# EAGLE board Copy of demo (EAGLE 5.11)
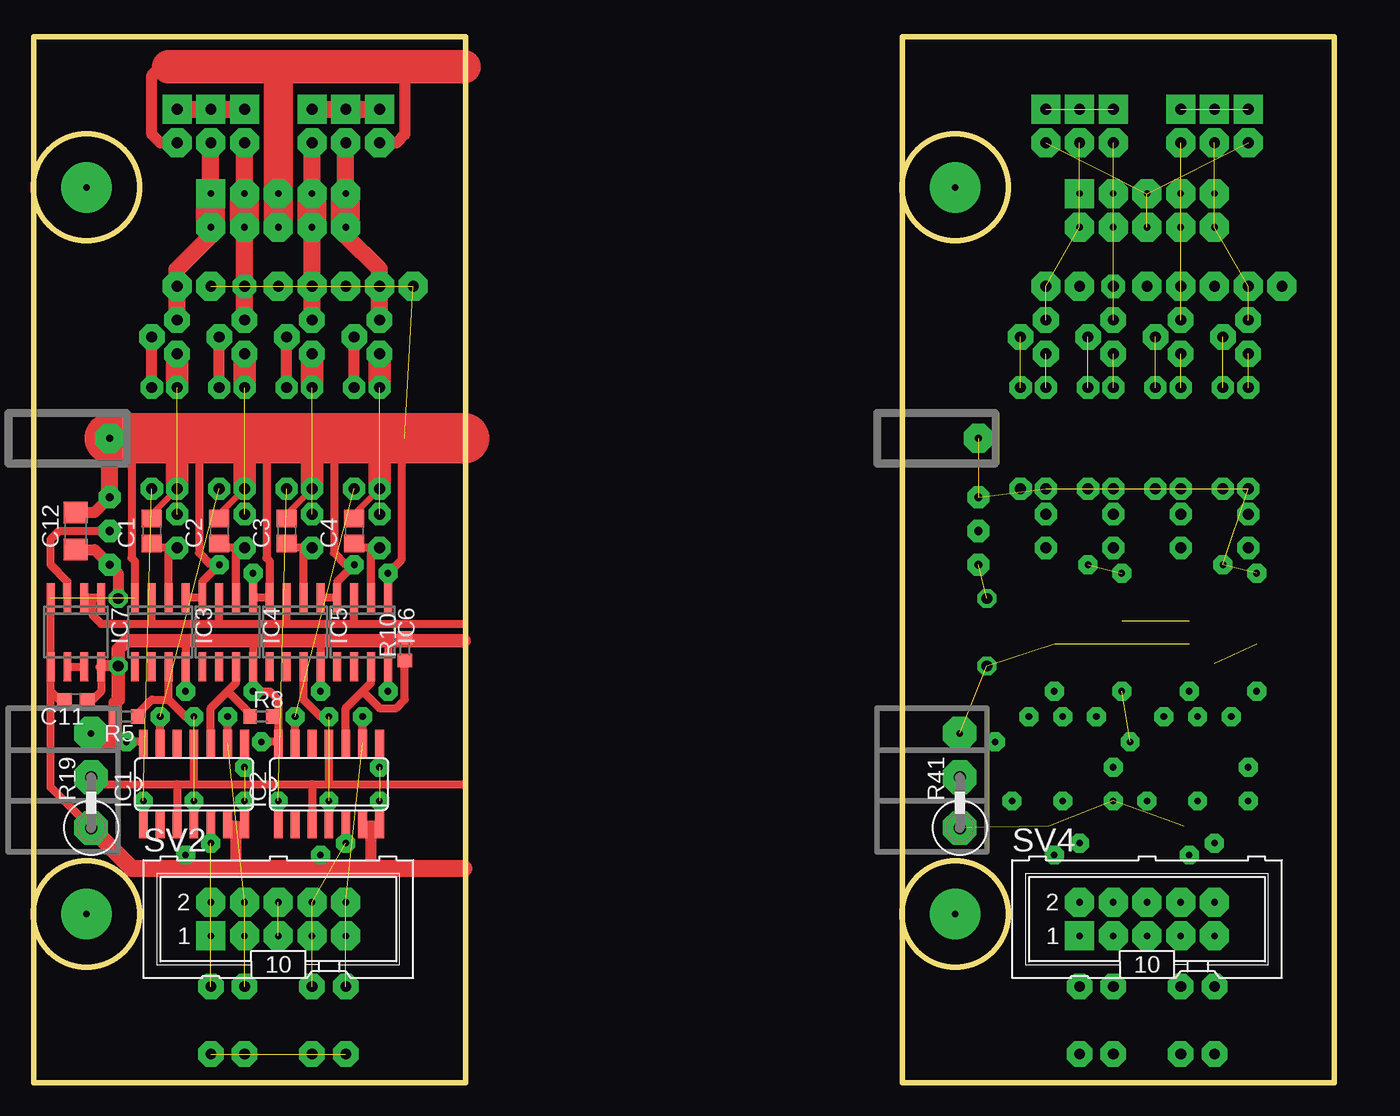
[diagram p0: board, top side]
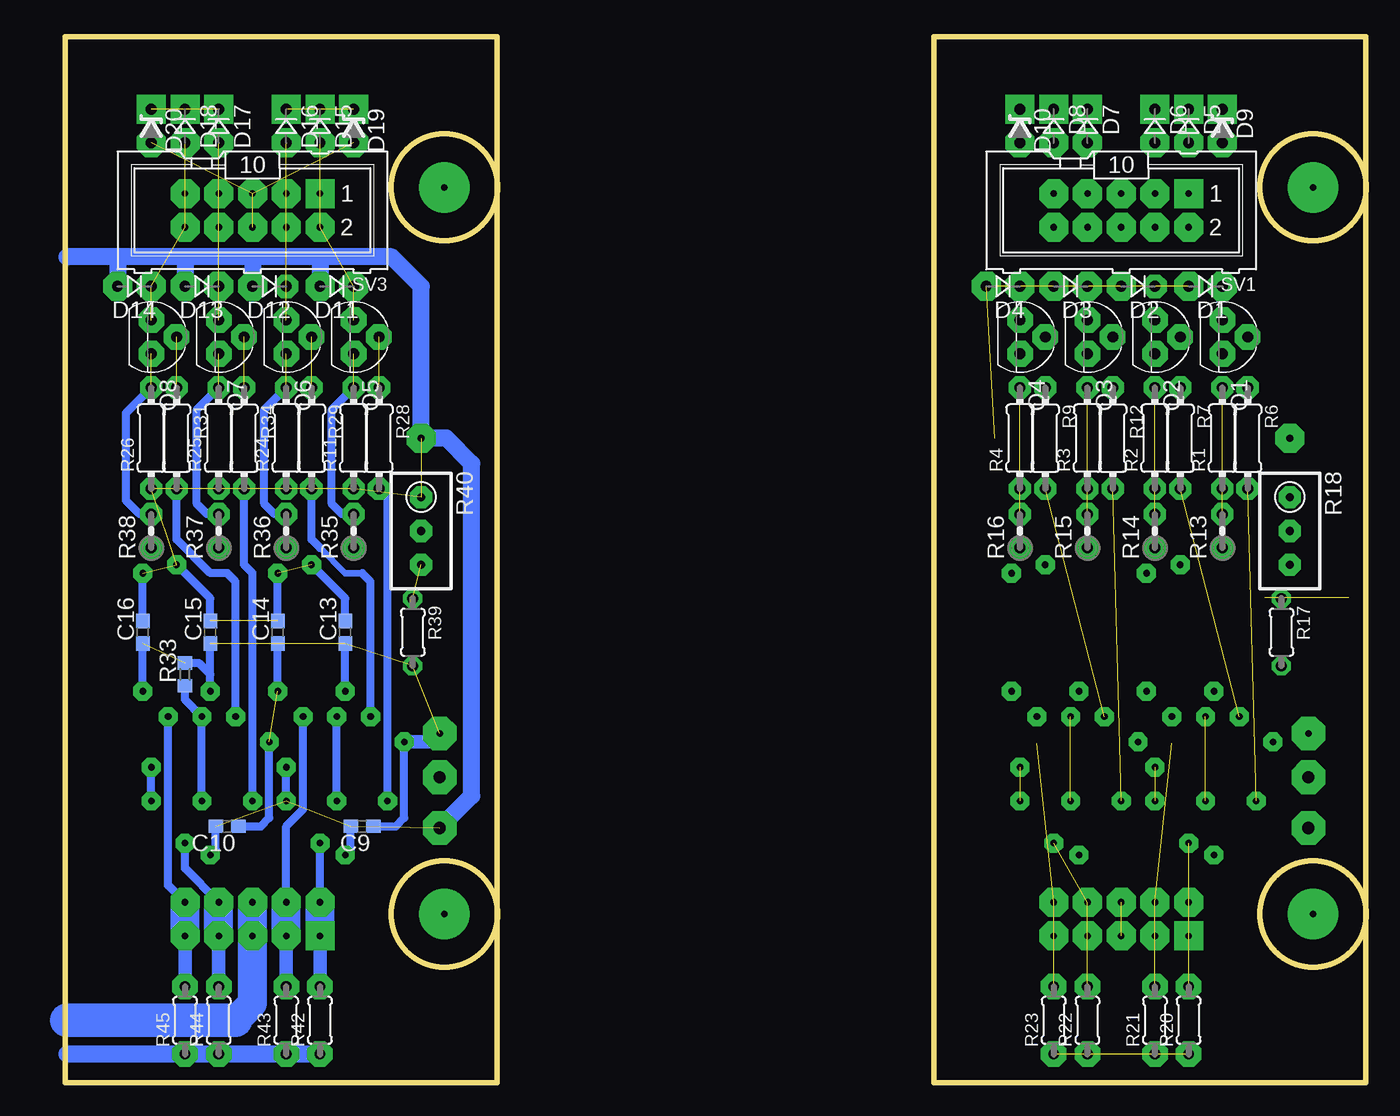
[diagram p1: board, bottom side, seen from below]

Size 97.97 x 78.74 mm. Coordinates in mm from the lower left corner, seen from the top.
Outline: 0.04,0 32.56,0 32.56,78.74 0.04,78.74 0.04,0
Outline: 65.45,0 97.97,0 97.97,78.74 65.45,78.74 65.45,0
Outline: circle at 4,12.71 radius 4
Outline: circle at 4,67.39 radius 4
Outline: circle at 69.41,12.71 radius 4
Outline: circle at 69.41,67.39 radius 4
Copper layers (1*16): Top 0.035mm / dielectric 1.5mm / Bottom 0.035mm
Design rules "default *": minimum track width 10mil, minimum drill 19mil, track to track 8mil, track to pad 8mil, pad to pad 8mil, via to via 8mil, smd to smd 8mil, copper to edge 40mil, drill to drill 8mil, minimum pad ring 10mil, minimum via ring 8mil, stop-mask expansion 4mil, vias tented up to drill 0mil, thermal gap 10mil

## Footprints (pad centres in the part's own frame; a part is rotated, then mirrored left to right if it is on the bottom)
C0805 = smd 1.3 x 1.5: 1 -0.95,0; 2 0.95,0
C0603 = smd 1.1 x 1: 1 -0.85,0; 2 0.85,0
C1206 = smd 1.6 x 1.8: 1 -1.4,0; 2 1.4,0
D-2.5 = drill 0.813 octagon: A 1.27,0; C -1.27,0
ZDIO-2.5 = drill 0.813 octagon: A 1.27,0; C -1.27,0
SO14 = smd 0.66 x 2.032: 1 -3.81,-3.073; 2 -2.54,-3.073; 3 -1.27,-3.073; 4 0,-3.073; 5 1.27,-3.073; 6 2.54,-3.073; 7 3.81,-3.073; 8 3.81,3.073; 9 2.54,3.073; 10 1.27,3.073; 11 0,3.073; 12 -1.27,3.073; 13 -2.54,3.073; 14 -3.81,3.073
SO08 = smd 0.6 x 2.2: 1 -1.905,-2.6; 2 -0.635,-2.6; 3 0.635,-2.6; 4 1.905,-2.6; 5 1.905,2.6; 6 0.635,2.6; 7 -0.635,2.6; 8 -1.905,2.6
TO92 = drill 0.813 octagon: 1 1.27,0; 2 0,1.905; 3 -1.27,0
0204/7 = drill 0.813 octagon: 1 -3.81,0; 2 3.81,0
R0603 = smd 1 x 1.1: 1 -0.85,0; 2 0.85,0
0204V = drill 0.813 octagon: 1 -1.27,0; 2 1.27,0
0204/5 = drill 0.813 octagon: 1 -2.54,0; 2 2.54,0
RTRIM3296W = drill 0.61 round: 1 0,-2.54; 2 0,0; 3 0,2.54
0411V = drill 0.914 octagon: 1 -2.54,0; 2 1.27,0
M10-HOME = drill 0.5 pad 2.184 square: 1 -5.08,-1.27 | drill 0.5 pad 2.184 octagon: 2 -5.08,1.27; 3 -2.54,-1.27; 4 -2.54,1.27; 5 0,-1.27; 6 0,1.27; 7 2.54,-1.27; 8 2.54,1.27; 9 5.08,-1.27; 10 5.08,1.27

## Placement (x,y rotation side)
C1  100nF  [C0805]  8.93,41.53 90 top
C2  100nF  [C0805]  14.01,41.53 90 top
C3  100nF  [C0805]  19.09,41.53 90 top
C4  100nF  [C0805]  24.17,41.53 90 top
C9  100nF  [C0603]  75.61,19.3 180 bottom
C10  100nF  [C0603]  85.77,19.3 180 bottom
C11  100nF  [C0603]  3.21,28.83 180 top
C12  100nF  [C1206]  3.21,41.53 90 top
C13  100nF  [C0603]  76.88,33.91 90 bottom
C14  100nF  [C0603]  81.96,33.91 90 bottom
C15  100nF  [C0603]  87.04,33.91 90 bottom
C16  100nF  [C0603]  92.12,33.91 90 bottom
D1  [D-2.5]  12.11,59.94 180 bottom
D2  [D-2.5]  17.18,59.94 180 bottom
D3  [D-2.5]  22.27,59.94 180 bottom
D4  [D-2.5]  27.34,59.94 180 bottom
D5  [D-2.5]  13.38,72.01 270 bottom
D6  [D-2.5]  15.91,72.01 270 bottom
D7  [D-2.5]  20.99,72.01 270 bottom
D8  [D-2.5]  23.54,72.01 270 bottom
D9  [ZDIO-2.5]  10.84,72.01 270 bottom
D10  [ZDIO-2.5]  26.07,72.01 270 bottom
D11  [D-2.5]  77.51,59.94 180 bottom
D12  [D-2.5]  82.59,59.94 180 bottom
D13  [D-2.5]  87.67,59.94 180 bottom
D14  [D-2.5]  92.75,59.94 180 bottom
D15  [D-2.5]  78.78,72.01 270 bottom
D16  [D-2.5]  81.32,72.01 270 bottom
D17  [D-2.5]  86.4,72.01 270 bottom
D18  [D-2.5]  88.94,72.01 270 bottom
D19  [ZDIO-2.5]  76.24,72.01 270 bottom
D20  [ZDIO-2.5]  91.48,72.01 270 bottom
IC1  4013D  [SO14]  12.11,22.48 0 top
IC2  4013D  [SO14]  22.27,22.48 0 top
IC3  LM311D  [SO08]  9.57,33.91 180 top
IC4  LM311D  [SO08]  14.64,33.91 180 top
IC5  LM311D  [SO08]  19.72,33.91 180 top
IC6  LM311D  [SO08]  24.8,33.91 180 top
IC7  LM358D  [SO08]  3.21,33.91 180 top
Q1  BC547  [TO92]  10.84,56.13 270 bottom
Q2  BC547  [TO92]  15.91,56.13 270 bottom
Q3  BC547  [TO92]  20.99,56.13 270 bottom
Q4  BC547  [TO92]  26.07,56.13 270 bottom
Q5  BC547  [TO92]  76.24,56.13 270 bottom
Q6  BC547  [TO92]  81.32,56.13 270 bottom
Q7  BC547  [TO92]  86.4,56.13 270 bottom
Q8  BC547  [TO92]  91.48,56.13 270 bottom
R1  1R0  [0204/7]  10.84,48.51 90 bottom
R2  1R0  [0204/7]  15.91,48.51 90 bottom
R3  1R0  [0204/7]  20.99,48.51 90 bottom
R4  1R0  [0204/7]  26.07,48.51 90 bottom
R5  1K  [R0603]  7.03,27.56 180 top
R6  1K  [0204/7]  8.93,48.51 270 bottom
R7  1K  [0204/7]  14.01,48.51 270 bottom
R8  1K  [R0603]  17.18,27.56 0 top
R9  1K  [0204/7]  24.17,48.51 270 bottom
R10  1K  [R0603]  27.98,32.64 90 top
R11  1R0  [0204/7]  76.24,48.51 90 bottom
R12  1K  [0204/7]  19.09,48.51 270 bottom
R13  1K  [0204V]  10.84,41.53 90 bottom
R14  1K  [0204V]  15.91,41.53 90 bottom
R15  1K  [0204V]  20.99,41.53 90 bottom
R16  1K  [0204V]  26.07,41.53 90 bottom
R17  2K  [0204/5]  6.39,33.91 270 bottom
R18  2K  [RTRIM3296W]  5.75,41.53 180 bottom
R19  1K  [0411V]  4.36,21.72 90 top
R20  [0204/5]  13.38,4.7 90 bottom
R21  [0204/5]  15.91,4.7 90 bottom
R22  [0204/5]  20.99,4.7 90 bottom
R23  [0204/5]  23.54,4.7 90 bottom
R24  1R0  [0204/7]  81.32,48.51 90 bottom
R25  1R0  [0204/7]  86.4,48.51 90 bottom
R26  1R0  [0204/7]  91.48,48.51 90 bottom
R28  1K  [0204/7]  74.34,48.51 270 bottom
R29  1K  [0204/7]  79.42,48.51 270 bottom
R31  1K  [0204/7]  89.58,48.51 270 bottom
R33  1K  [R0603]  88.94,30.73 90 bottom
R34  1K  [0204/7]  84.5,48.51 270 bottom
R35  1K  [0204V]  76.24,41.53 90 bottom
R36  1K  [0204V]  81.32,41.53 90 bottom
R37  1K  [0204V]  86.4,41.53 90 bottom
R38  1K  [0204V]  91.48,41.53 90 bottom
R39  2K  [0204/5]  71.8,33.91 270 bottom
R40  2K  [RTRIM3296W]  71.16,41.53 180 bottom
R41  1K  [0411V]  69.76,21.72 90 top
R42  [0204/5]  78.78,4.7 90 bottom
R43  [0204/5]  81.32,4.7 90 bottom
R44  [0204/5]  86.4,4.7 90 bottom
R45  [0204/5]  88.94,4.7 90 bottom
SV1  BH10S  [M10-HOME]  18.45,65.66 180 bottom
SV2  BH10S  [M10-HOME]  18.45,12.32 0 top
SV3  BH10S  [M10-HOME]  83.86,65.66 180 bottom
SV4  BH10S  [M10-HOME]  83.86,12.32 0 top

## Library data of the parts
C1-C4 C9-C16 R1-R26 R28 R29 R31 R33-R45 = rcl
D1-D20 = diode
IC1 IC2 = 40xx
IC3-IC7 = linear
Q1-Q8 = transistor-npn
SV1-SV4 = con-harting-ml

## Nets
+5V1: C11.1 IC1.14 IC2.14 IC3.8 IC4.8 IC5.8 IC6.8 IC7.8 R5.2 R8.2 R10.2 R17.2
+5V2: C9.1 C10.1 C13.1 C14.1 C15.1 C16.1 R33.2 R39.2
CMP_REF1: IC3.3 IC4.3 IC5.3 IC6.3 IC7.1 IC7.2
FB1: Q1.1 R1.2 R13.2
FB2: Q2.1 R2.2 R14.2
FB3: Q3.1 R3.2 R15.2
FB4: Q4.1 R4.2 R16.2
FB5: Q5.1 R11.2 R35.2
FB6: Q6.1 R24.2 R36.2
FB7: Q7.1 R25.2 R37.2
FB8: Q8.1 R26.2 R38.2
GND1: C1.2 C2.2 C3.2 C4.2 C11.2 C12.2 D1.A D2.A D3.A D4.A IC1.6 IC1.7 IC1.8 IC2.6 IC2.7 IC2.8 IC3.1 IC3.4 IC4.1 IC4.4 IC5.1 IC5.4 IC6.1 IC6.4 IC7.4 IC7.5 R1.1 R2.1 R3.1 R4.1 R18.1 R19.1
GND2: C9.2 C10.2 C13.2 C14.2 C15.2 C16.2 D11.A D12.A D13.A D14.A R11.1 R24.1 R25.1 R26.1 R40.1 R41.1
M1: D1.C D5.A Q1.3 SV1.1 SV1.2
M2: D2.C D6.A Q2.3 SV1.3 SV1.4
M3: D3.C D7.A Q3.3 SV1.7 SV1.8
M4: D4.C D8.A Q4.3 SV1.9 SV1.10
M5: D11.C D15.A Q5.3 SV3.1 SV3.2
M6: D12.C D16.A Q6.3 SV3.3 SV3.4
M7: D13.C D17.A Q7.3 SV3.7 SV3.8
M8: D14.C D18.A Q8.3 SV3.9 SV3.10
M11_EN1: IC1.5 R20.2 SV2.1 SV2.2
M11_EN2: R42.2 SV4.1 SV4.2
M12_EN1: IC1.9 R21.2 SV2.3 SV2.4
M12_EN2: R43.2 SV4.3 SV4.4
M13_EN1: IC2.5 R22.2 SV2.7 SV2.8
M13_EN2: R44.2 SV4.7 SV4.8
M14_EN1: IC2.9 R23.2 SV2.9 SV2.10
M14_EN2: R45.2 SV4.9 SV4.10
N$24: Q1.2 R6.1
N$25: IC1.1 R6.2
N$26: IC1.4 IC3.7 R5.1
N$27: IC1.10 IC4.7 R8.1
N$28: IC1.13 R7.2
N$29: Q2.2 R7.1
N$30: Q4.2 R9.1
N$31: IC2.13 R9.2
N$32: IC2.10 IC6.7 R10.1
N$33: Q3.2 R12.1
N$34: IC2.1 R12.2
N$35: IC2.4 IC5.7
N$36: C4.1 IC6.2 R16.1
N$37: C3.1 IC5.2 R15.1
N$38: C2.1 IC4.2 R14.1
N$39: C1.1 IC3.2 R13.1
N$40: C12.1 R17.1 R18.3
N$41: IC7.6 IC7.7
N$42: D5.C D6.C D9.C
N$43: D7.C D8.C D10.C
N$46: Q5.2 R28.1
N$47: R28.2
N$51: R29.2
N$52: Q6.2 R29.1
N$53: Q8.2 R31.1
N$54: R31.2
N$56: Q7.2 R34.1
N$57: R34.2
N$58: R33.1
N$59: R38.1
N$60: R37.1
N$61: R36.1
N$62: R35.1
N$63: R39.1 R40.3
N$65: D15.C D16.C D19.C
N$66: D17.C D18.C D20.C
S$1: D9.A D10.A SV1.5 SV1.6
S$3: R20.1 R21.1 R22.1 R23.1
S$4: D19.A D20.A SV3.5 SV3.6
S$5: R42.1 R43.1 R44.1 R45.1
TR_CLK1: IC1.3 IC1.11 IC2.3 IC2.11 R19.2
TR_CLK2: R41.2
VCC1: SV2.5 SV2.6
VCC2: SV4.5 SV4.6
~0.5V1: IC7.3 R18.2
~0.5V2: R40.2

## Tracks (layer width: path | path; a pad name or v marks a point on that pad's centre or on a via)
+5V1  (via drill 0.5 pad 1.42, 0.5 pad 2.54)
  Top 0.61: 11.47,33.27 16.55,33.27 | 21.63,33.27 16.55,33.27 | 25.44,33.27 21.63,33.27 | 21.63,33.27 IC5.8 v21.63,29.46 | 18.45,27.56 IC2.14 18.35,25.65 v17.18,25.65 | 18.45,27.56 18.45,28.83 17.82,29.46 v16.55,29.46 IC4.8 16.55,33.27 | 11.47,33.27 IC3.8 v11.47,29.46 | v26.71,29.46 IC6.8 26.71,33.27 27.56,33.49 R10.2 | 18.45,27.56 R8.2 | v7.03,25.65 8.19,25.65 IC1.14 | C11.1 4.49,28.83 5.12,29.46 IC7.8 | 7.71,33.27 11.47,33.27
  Top 0.813: v6.39,31.37 5.18,31.37 IC7.8
  Top 1.016: 32.42,33.27 26.71,33.27 25.44,33.27 7.71,33.27 7.03,33.27 6.39,32.64 v6.39,31.37 6.39,28.83 6.17,28.61 R5.2 6.17,25.87 6.39,25.65 | v7.03,25.65 6.39,25.65 | 6.39,25.65 4.99,25.65 v4.36,26.29
+5V2  (via drill 0.5 pad 1.42, 0.5 pad 2.54)  (6 unrouted)
  Bottom 0.61: v76.88,29.46 C13.1 | v81.96,29.46 C14.1 | C15.1 v87.04,29.46 87.04,30.73 87.89,31.58 R33.2 | v92.12,29.46 C16.1 | C10.1 83.23,19.3 82.59,19.94 v82.59,25.65 | C9.1 73.07,19.3 72.43,19.94 v72.43,25.65
  Bottom 1.016: v72.43,25.65 70.4,25.65 v69.76,26.29
  other vias: 71.8,31.37
CMP_REF1
  Top 0.61: 8.93,34.54 IC3.3 | 8.93,34.54 14.01,34.54 | 14.01,34.54 19.09,34.54 | 19.09,34.54 24.17,34.54 | 24.17,34.54 32.42,34.54 | 24.17,34.54 IC6.3 | 19.09,34.54 IC5.3 | 14.01,34.54 IC4.3 | IC7.2 IC7.1 4.49,36.45 4.49,35.18 5.12,34.54 8.93,34.54
FB1  (via drill 0.5 pad 1.68, 0.5 pad 1.93)  (1 unrouted)
  Top 1.676: R1.2 Q1.1
  other vias: 10.84,54.86 10.84,52.32 10.84,42.8
FB2  (via drill 0.5 pad 1.68, 0.5 pad 1.93)  (1 unrouted)
  Top 1.676: R2.2 Q2.1
  other vias: 15.91,54.86 15.91,52.32 15.91,42.8
FB3  (via drill 0.5 pad 1.68, 0.5 pad 1.93)  (1 unrouted)
  Top 1.676: R3.2 Q3.1
  other vias: 20.99,54.86 20.99,52.32 20.99,42.8
FB4  (via drill 0.5 pad 1.68, 0.5 pad 1.93)  (1 unrouted)
  Top 1.676: R4.2 Q4.1
  other vias: 26.07,54.86 26.07,52.32 26.07,42.8
FB5  (via drill 0.5 pad 1.68, 0.5 pad 1.93)  (1 unrouted)
  Bottom 0.61: R11.2 77.89,50.67 77.89,43.56 77.13,42.8 R35.2
  other vias: 76.24,54.86 76.24,52.32 76.24,42.8
FB6  (via drill 0.5 pad 1.68, 0.5 pad 1.93)  (1 unrouted)
  Bottom 0.61: R24.2 82.97,50.67 82.97,43.56 82.21,42.8 R36.2
  other vias: 81.32,54.86 81.32,52.32 81.32,42.8
FB7  (via drill 0.5 pad 1.68, 0.5 pad 1.93)  (1 unrouted)
  Bottom 0.61: R25.2 88.05,50.67 88.05,43.56 87.29,42.8 R37.2
  other vias: 86.4,54.86 86.4,52.32 86.4,42.8
FB8  (via drill 0.5 pad 1.68, 0.5 pad 1.93)  (1 unrouted)
  Bottom 0.61: R26.2 93.39,50.42 93.39,43.81 92.37,42.8 R38.2
  other vias: 91.48,54.86 91.48,52.32 91.48,42.8
GND1  (via drill 0.5 pad 1.42, 0.5 pad 1.68, 0.5 pad 2.18, 0.5 pad 2.54)  (7 unrouted)
  Top 0.508: R4.1 24.17,42.8 | R3.1 19.09,42.8 | R2.1 14.01,42.8 | R1.1 8.93,42.8
  Top 0.61: IC5.1 IC6.4 22.9,37.72 v24.17,38.99 23.54,38.99 22.65,39.88 22.65,47.88 22.9,48.13 22.9,48.51 | v16.55,38.35 IC4.1 IC5.4 17.82,39.24 17.57,39.5 17.57,48.39 17.69,48.51 | v26.71,38.35 IC6.1 | v26.71,38.35 26.71,36.45 | 11.53,36.51 IC3.1 IC4.4 12.74,37.72 v14.01,38.99 13.38,38.99 12.49,39.88 12.49,48.51 | 26.07,25.65 IC2.8 v26.07,23.75 | v26.71,38.35 27.73,39.37 27.73,48.51 | 24.17,42.8 C4.2 | 14.01,42.8 C2.2 | 19.09,42.8 C3.2 | IC1.8 v15.91,23.75 | IC3.4 7.66,39.24 7.41,39.5 7.41,48.39 7.53,48.51 | 26.07,48.51 26.71,47.24 | IC2.7 IC2.6 | IC2.7 v26.07,21.21 | v15.91,21.21 IC1.7 IC1.6 15.18,19.41 15.28,19.3 | IC2.7 25.54,19.41 25.44,19.3 | 8.93,42.8 C1.2 | IC7.4 IC7.5 1.31,29.46 | C11.2 1.95,28.83 1.31,29.46 | 1.31,29.46 1.31,22.23 R19.1
  Top 0.813: 27.98,48.51 27.98,47.88 | C12.2 4.62,42.93 R18.1 | 25.44,16.13 25.44,19.3 | 15.28,16.13 15.28,19.3
  Top 1.27: 32.42,16.13 25.44,16.13 21.63,16.13 | R18.1 v5.75,48.51 | 21.63,16.13 v21.63,17.14 | 21.63,16.13 15.28,16.13 11.47,16.13 | 11.47,16.13 v11.47,17.14 | 11.47,16.13 7.41,16.13 R19.1
  Top 1.676: 26.07,48.51 R4.1 | 20.99,48.51 R3.1 | 15.91,48.51 R2.1 | 10.84,48.51 R1.1
  Top 2.54: 27.73,48.51 27.98,48.51
  Top 3.81: 27.98,48.51 32.42,48.51 | 27.73,48.51 26.07,48.51 22.9,48.51 20.99,48.51 17.69,48.51 15.91,48.51 12.49,48.51 10.84,48.51 7.53,48.51 v5.75,48.51
  other vias: 28.61,59.94 26.07,44.7 23.54,59.94 18.45,59.94 20.99,44.7 15.91,44.7 13.38,59.94 10.84,44.7 5.75,44.07 4.36,19.18
GND2  (via drill 0.5 pad 1.42, 0.5 pad 1.68, 0.5 pad 2.18, 0.5 pad 2.54)  (12 unrouted)
  Bottom 0.61: C16.2 v92.12,38.35 | C15.2 87.04,36.45 v89.58,38.99 | C14.2 v81.96,38.35 | C13.2 76.88,36.45 v79.42,38.99 | v87.04,17.14 86.62,17.57 C10.2 | v81.32,21.21 v81.32,23.75 | v76.88,17.14 76.46,17.57 C9.2
  Bottom 1.27: 94.02,62.16 97.83,62.16 | 94.02,62.16 D14.A | 88.94,62.16 94.02,62.16 | 88.94,62.16 D13.A | 83.86,62.16 88.94,62.16 | 83.86,62.16 D12.A | 78.78,62.16 83.86,62.16 | 78.78,62.16 D11.A | 78.78,62.16 73.38,62.16 71.16,59.94 v71.16,48.51 69.26,48.51 67.35,46.61 67.35,21.59 R41.1
  other vias: 91.48,44.7 94.02,59.94 88.94,59.94 86.4,44.7 83.86,59.94 78.78,59.94 81.32,44.7 76.24,44.7 71.16,44.07 69.76,19.18
M1  (via drill 0.5 pad 1.93, 0.5 pad 2.18)
  Top 1.27: SV1.2 13.38,63.75 10.84,61.21 D1.C Q1.3 | SV1.1 D5.A
  Top 2.184: SV1.2 SV1.1
  other vias: 10.84,57.4 10.84,59.94 13.38,70.74
M2  (via drill 0.5 pad 1.78, 0.5 pad 1.93, 0.5 pad 2.18)
  Top 1.27: Q2.3 D2.C SV1.4 | SV1.3 D6.A
  Top 2.184: SV1.4 SV1.3
  other vias: 15.91,57.4 15.91,59.94 15.91,70.74
M3  (via drill 0.5 pad 1.93, 0.5 pad 2.18)
  Top 1.27: Q3.3 v20.99,59.94 SV1.8 | SV1.7 D7.A
  Top 2.184: SV1.8 SV1.7
  other vias: 20.99,57.4 20.99,70.74
M4  (via drill 0.5 pad 1.93, 0.5 pad 2.18)
  Top 1.27: SV1.10 23.54,63.75 26.07,61.21 D4.C Q4.3 | SV1.9 D8.A
  Top 2.184: SV1.10 SV1.9
  other vias: 26.07,57.4 26.07,59.94 23.54,70.74
M5  (via drill 0.5 pad 1.93, 0.5 pad 2.18)  (4 unrouted)
  other vias: 76.24,57.4 76.24,59.94 78.78,70.74
M6  (via drill 0.5 pad 1.78, 0.5 pad 1.93, 0.5 pad 2.18)  (4 unrouted)
  other vias: 81.32,57.4 81.32,59.94 81.32,70.74
M7  (via drill 0.5 pad 1.93, 0.5 pad 2.18)  (4 unrouted)
  other vias: 86.4,57.4 86.4,59.94 86.4,70.74
M8  (via drill 0.5 pad 1.93, 0.5 pad 2.18)  (4 unrouted)
  other vias: 91.48,57.4 91.48,59.94 88.94,70.74
M11_EN1  (via drill 0.5 pad 1.42, 0.5 pad 1.93)  (3 unrouted)
  Top 0.61: IC1.5 v13.38,18.03
  other vias: 13.38,7.24
M11_EN2  (via drill 0.5 pad 1.42, 0.5 pad 1.93)
  Bottom 0.61: SV4.2 v78.78,18.03
  Bottom 1.016: R42.2 SV4.1
  Bottom 2.184: SV4.1 SV4.2
  other vias: 78.78,7.24
M12_EN1  (via drill 0.5 pad 1.42, 0.5 pad 1.93)  (3 unrouted)
  Top 0.61: IC1.9 v14.64,27.56
  other vias: 15.91,7.24
M12_EN2  (via drill 0.5 pad 1.42, 0.5 pad 1.93)
  Bottom 0.61: SV4.4 81.32,19.3 80.05,20.57 v80.05,27.56
  Bottom 1.016: R43.2 SV4.3
  Bottom 2.184: SV4.3 SV4.4
  other vias: 81.32,7.24
M13_EN1  (via drill 0.5 pad 1.42, 0.5 pad 1.93)  (3 unrouted)
  Top 0.61: IC2.5 v23.54,18.03
  other vias: 20.99,7.24
M13_EN2  (via drill 0.5 pad 1.42, 0.5 pad 1.93)
  Bottom 0.61: SV4.8 88.94,16.13 v88.94,18.03
  Bottom 1.016: R44.2 SV4.7
  Bottom 2.184: SV4.7 SV4.8
  other vias: 86.4,7.24
M14_EN1  (via drill 0.5 pad 1.42, 0.5 pad 1.93)  (3 unrouted)
  Top 0.61: IC2.9 v24.8,27.56
  other vias: 23.54,7.24
M14_EN2  (via drill 0.5 pad 1.42, 0.5 pad 1.93)
  Bottom 0.61: SV4.10 90.21,14.86 v90.21,27.56
  Bottom 1.016: R45.2 SV4.9
  Bottom 2.184: SV4.9 SV4.10
  other vias: 88.94,7.24
N$6  (via drill 0.5 pad 3.81)
  other vias: 4,67.39
N$23  (via drill 0.5 pad 3.81)
  other vias: 4,12.71
N$24  (via drill 0.5 pad 1.68, 0.5 pad 1.93)
  Top 0.813: R6.1 Q1.2
  other vias: 8.93,52.32 8.93,56.13
N$25  (via drill 0.5 pad 1.42, 0.5 pad 1.68)  (1 unrouted)
  Top 0.61: IC1.1 v8.3,21.21
  other vias: 8.93,44.7
N$26  (via drill 0.5 pad 1.42)  (1 unrouted)
  Top 0.61: 10.2,28.83 IC3.7 | v12.11,27.56 11.47,27.56 10.2,28.83 | IC1.4 v12.11,21.21 | R5.1 7.88,27.77 8.93,28.83 10.2,28.83
N$27
  Top 0.61: IC1.10 13.38,28.19 14.64,29.46 | 14.64,29.46 15.28,30.1 IC4.7 | R8.1 16.34,27.77 14.64,29.46
N$28  (via drill 0.5 pad 1.42, 0.5 pad 1.68)  (1 unrouted)
  Top 0.61: IC1.13 v9.57,27.56
  other vias: 14.01,44.7
N$29  (via drill 0.5 pad 1.68, 0.5 pad 1.93)
  Top 0.813: R7.1 Q2.2
  other vias: 14.01,56.13 14.01,52.32
N$30  (via drill 0.5 pad 1.68, 0.5 pad 1.93)
  Top 0.813: R9.1 Q4.2
  other vias: 24.17,56.13 24.17,52.32
N$31  (via drill 0.5 pad 1.42, 0.5 pad 1.68)  (1 unrouted)
  Top 0.61: IC2.13 v19.72,27.56
  other vias: 24.17,44.7
N$32
  Top 0.61: IC2.10 23.54,28.19 24.8,29.46 | 24.8,29.46 25.44,30.1 IC6.7 | R10.1 27.98,28.83 27.34,28.19 26.07,28.19 24.8,29.46
N$33  (via drill 0.5 pad 1.68, 0.5 pad 1.93)
  Top 0.813: R12.1 Q3.2
  other vias: 19.09,56.13 19.09,52.32
N$34  (via drill 0.5 pad 1.42, 0.5 pad 1.68)  (1 unrouted)
  Top 0.61: IC2.1 v18.45,21.21
  other vias: 19.09,44.7
N$35  (via drill 0.5 pad 1.42)  (1 unrouted)
  Top 0.61: v22.27,27.56 21.63,27.56 20.36,28.83 IC5.7 | IC2.4 v22.27,21.21
N$36  (via drill 0.5 pad 1.68)
  Top 0.61: 25.44,40.26 24.49,40.26 C4.1 | IC6.2 25.44,40.26 | 25.44,40.26 v26.07,40.26
N$37  (via drill 0.5 pad 1.68)
  Top 0.61: 20.36,40.26 19.41,40.26 C3.1 | IC5.2 20.36,40.26 | 20.36,40.26 v20.99,40.26
N$38  (via drill 0.5 pad 1.68)
  Top 0.61: 15.28,40.26 14.33,40.26 C2.1 | IC4.2 15.28,40.26 | 15.28,40.26 v15.91,40.26
N$39  (via drill 0.5 pad 1.68)
  Top 0.61: 10.2,40.26 9.25,40.26 C1.1 | IC3.2 10.2,40.26 | 10.2,40.26 v10.84,40.26
N$40  (via drill 0.5 pad 1.42, 0.5 pad 1.68)
  Top 0.813: C12.1 4.62,40.13 R18.3 6.39,38.35 R17.1
  other vias: 5.75,38.99 6.39,36.45
N$41
  Top 0.61: IC7.6 IC7.7
N$42  (via drill 0.5 pad 2.18)
  Top 1.27: v15.91,73.28 v13.38,73.28 v10.84,73.28
N$43  (via drill 0.5 pad 2.18)
  Top 1.27: v20.99,73.28 v23.54,73.28 v26.07,73.28
N$44  (via drill 0.5 pad 3.81)
  other vias: 69.41,67.39
N$45  (via drill 0.5 pad 3.81)
  other vias: 69.41,12.71
N$46  (via drill 0.5 pad 1.68, 0.5 pad 1.93)  (1 unrouted)
  other vias: 74.34,52.32 74.34,56.13
N$47  (via drill 0.5 pad 1.42, 0.5 pad 1.68)
  Bottom 0.61: v73.7,21.21 73.7,44.07 R28.2
  other vias: 74.34,44.7
N$48  (via drill 0.5 pad 1.42)
  Bottom 0.61: v77.51,21.21 v77.51,27.56
N$51  (via drill 0.5 pad 1.42, 0.5 pad 1.68)
  Bottom 0.508: 75.61,38.35 76.88,38.35 78.78,40.26
  Bottom 0.61: v74.97,27.56 74.97,37.72 75.61,38.35 | 78.78,40.26 79.42,40.89 R29.2
  other vias: 79.42,44.7
N$52  (via drill 0.5 pad 1.68, 0.5 pad 1.93)  (1 unrouted)
  other vias: 79.42,56.13 79.42,52.32
N$53  (via drill 0.5 pad 1.68, 0.5 pad 1.93)  (1 unrouted)
  other vias: 89.58,56.13 89.58,52.32
N$54  (via drill 0.5 pad 1.42, 0.5 pad 1.68)
  Bottom 0.61: v85.13,27.56 85.13,37.72 85.77,38.35 87.04,38.35 89.58,40.89 R31.2
  other vias: 89.58,44.7
N$56  (via drill 0.5 pad 1.68, 0.5 pad 1.93)  (1 unrouted)
  other vias: 84.5,56.13 84.5,52.32
N$57  (via drill 0.5 pad 1.42, 0.5 pad 1.68)
  Bottom 0.61: v83.86,21.21 83.86,38.35 84.5,38.99 R34.2
  other vias: 84.5,44.7
N$58  (via drill 0.5 pad 1.42)
  Bottom 0.61: v87.67,21.21 v87.67,27.56 88.94,28.83 R33.1
N$59  (via drill 0.5 pad 1.68)
  other vias: 91.48,40.26
N$60  (via drill 0.5 pad 1.68)
  other vias: 86.4,40.26
N$61  (via drill 0.5 pad 1.68)
  other vias: 81.32,40.26
N$62  (via drill 0.5 pad 1.68)
  other vias: 76.24,40.26
N$63  (via drill 0.5 pad 1.42, 0.5 pad 1.68)  (1 unrouted)
  other vias: 71.16,38.99 71.8,36.45
N$65  (via drill 0.5 pad 2.18)  (2 unrouted)
  other vias: 81.32,73.28 78.78,73.28 76.24,73.28
N$66  (via drill 0.5 pad 2.18)  (2 unrouted)
  other vias: 88.94,73.28 86.4,73.28 91.48,73.28
S$1  (via drill 0.5 pad 2.18)
  Top 0.813: D10.A 27.34,70.74 27.98,71.37 27.98,76.45 | 18.45,76.45 9.57,76.45 8.93,75.82 8.93,71.37 9.57,70.74 D9.A
  Top 2.184: SV1.6 SV1.5 18.45,76.45
  Top 2.54: 32.42,76.45 27.98,76.45 18.45,76.45 10.2,76.45
  other vias: 26.07,70.74 10.84,70.74
S$3  (via drill 0.5 pad 1.93)  (3 unrouted)
  other vias: 20.99,2.16 23.54,2.16 15.91,2.16 13.38,2.16
S$4  (via drill 0.5 pad 2.18)  (3 unrouted)
  other vias: 91.48,70.74 76.24,70.74
S$5  (via drill 0.5 pad 1.93)
  Bottom 1.016: R45.1 R44.1 R43.1 R42.1
  Bottom 1.27: 97.83,2.16 R45.1 R42.1
  other vias: 86.4,2.16 88.94,2.16 81.32,2.16 78.78,2.16
S$6  (via drill 0.5 pad 1.42)
  Bottom 0.61: v91.48,21.21 v91.48,23.75
TR_CLK1  (via drill 0.5 pad 2.54)
  Top 0.61: 12.11,22.48 IC1.11 | 10.84,22.48 IC1.3 | 12.11,22.48 20.99,22.48 | 20.99,22.48 22.27,22.48 | 22.27,22.48 IC2.11 | 20.99,22.48 IC2.3 | R19.2 4.87,22.48 10.84,22.48 | 22.27,22.48 32.42,22.48 | 10.84,22.48 12.11,22.48
  other vias: 4.36,22.99
TR_CLK2  (via drill 0.5 pad 2.54)
  other vias: 69.76,22.99
VCC1  (1 unrouted)
VCC2
  Bottom 2.184: SV4.6 SV4.5 83.86,5.97 85.13,4.7
  Bottom 2.54: 85.13,4.7 97.83,4.7
~0.5V1  (via drill 0.5 pad 1.68)
  Top 0.61: IC7.3 2.58,37.72 1.31,38.99 1.31,40.89 1.95,41.53 R18.2
  other vias: 5.75,41.53
~0.5V2  (via drill 0.5 pad 1.68)
  other vias: 71.16,41.53

## Text on the board
tDocu: P_GND | P_GND | +5V | +5V | TR_CLK | TR_CLK | OC3C | PE5_INT5 | OC3C | PE5_INT5 | S_GND | S_GND